# EAGLE board LED_base (EAGLE 9.6.2)
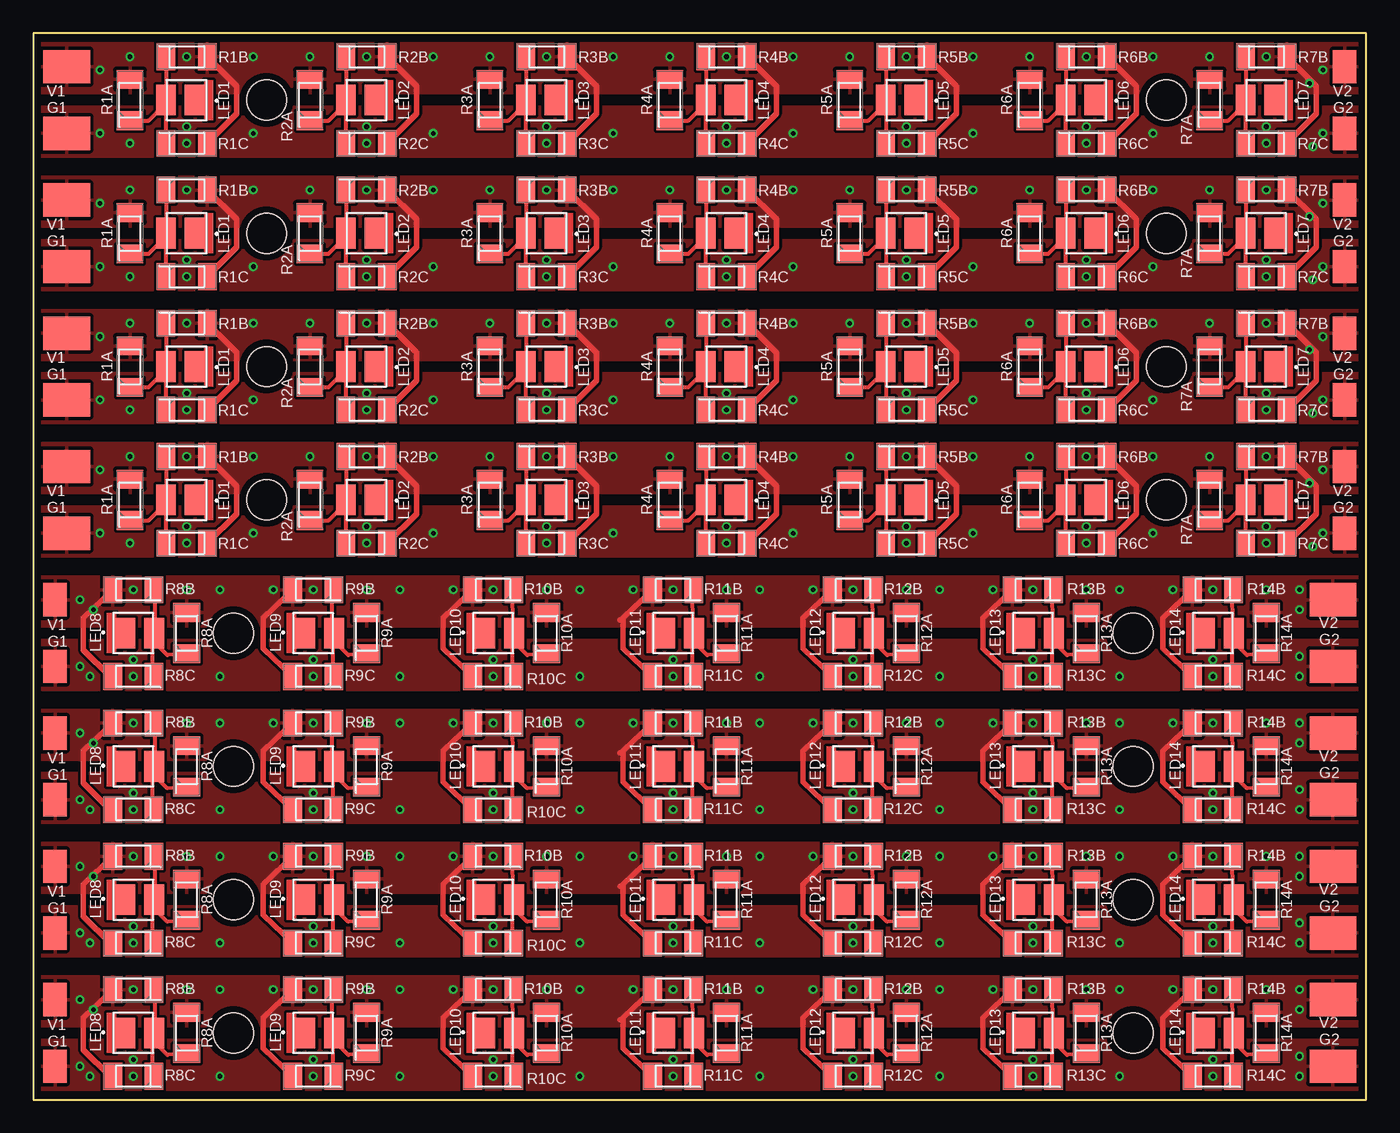
[diagram p0: board, top side]
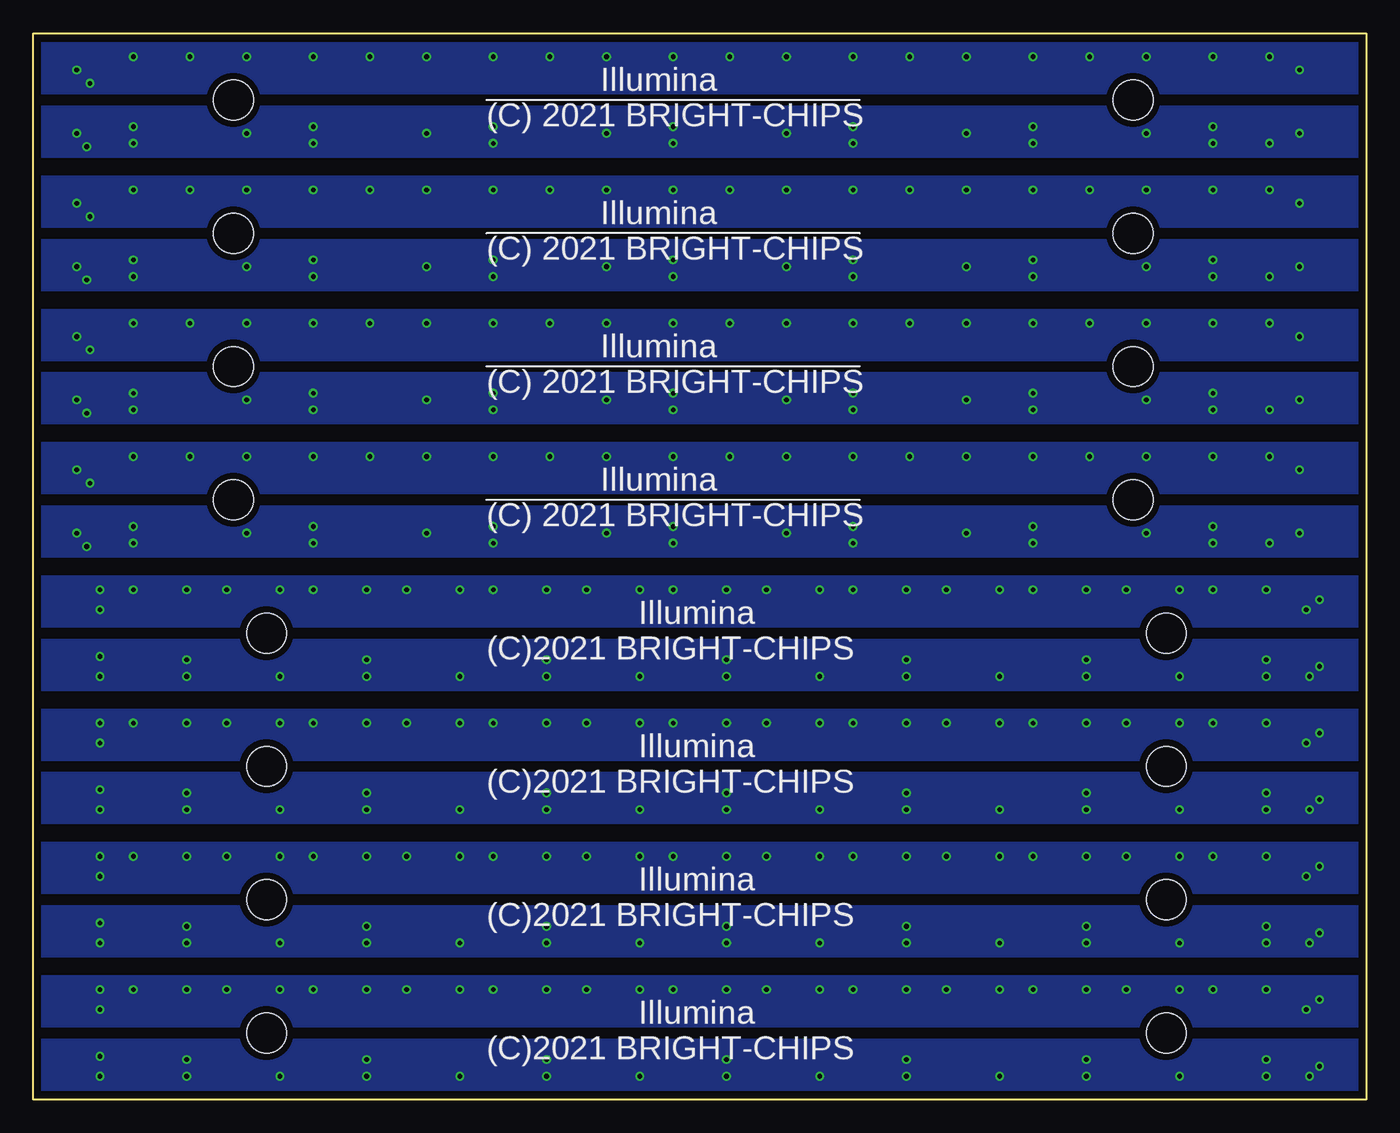
[diagram p1: board, bottom side, seen from below]

Size 100 x 80 mm. Coordinates in mm from the lower left corner, seen from the top.
Outline: 0,80 0,0 100,0 100,80 0,80
Copper layers (1*16): Top 0.035mm / dielectric 1.6mm / Bottom 0.035mm
Design rules "Elecrow_2-layer_PCB_eagle_rule": minimum track width 6mil, minimum drill 12mil, track to track 6mil, track to pad 6mil, pad to pad 6mil, via to via 8mil, smd to smd 0mil, copper to edge 20mil, drill to drill 10mil, minimum pad ring 6mil, minimum via ring 6mil, stop-mask expansion 0mil, vias tented up to drill 100mil, thermal gap 10mil
Net classes: 0 default: width 0.203 mm, clearance 0.203 mm; 1 PWRGND: width 0.406 mm, clearance 0.203 mm to class 0, clearance 0.203 mm
Holes 3 mm at 15,5 82.5,5 15,15 82.5,15 15,25 82.5,25 15,35 82.5,35 17.5,45 85,45 17.5,55 85,55 17.5,65 85,65 17.5,75 85,75
tKeepout: 7 lines

## Footprints (pad centres in the part's own frame; a part is rotated, then mirrored left to right if it is on the bottom)
SMD1.75-2.5 = smd 1.75 x 2.5: 1 0.875,1.25
SMD3.5-2.5 = smd 3.5 x 2.5: 1 1.75,1.25
NF2W757DRTX = smd 1.53 x 2.3: 1 -0.635,0 | smd 1.48 x 2.3: 2 1.56,0
SODFL3516X70NX = smd 1.4 x 2: 1 -1.55,0; 2 1.55,0

## Placement (x,y rotation side)
G1  [SMD1.75-2.5]  0.75,1.25 0 top
G2  [SMD3.5-2.5]  95.75,1.25 0 top
G3  [SMD3.5-2.5]  95.75,11.25 0 top
G4  [SMD1.75-2.5]  0.75,11.25 0 top
G5  [SMD3.5-2.5]  95.75,21.25 0 top
G6  [SMD1.75-2.5]  0.75,21.25 0 top
G7  [SMD3.5-2.5]  95.75,31.25 0 top
G8  [SMD1.75-2.5]  0.75,31.25 0 top
G9  [SMD3.5-2.5]  0.75,41.25 0 top
G10  [SMD1.75-2.5]  99.25,43.75 180 top
G11  [SMD3.5-2.5]  0.75,51.25 0 top
G12  [SMD1.75-2.5]  99.25,53.75 180 top
G13  [SMD3.5-2.5]  0.75,61.25 0 top
G14  [SMD1.75-2.5]  99.25,63.75 180 top
G15  [SMD3.5-2.5]  0.75,71.25 0 top
G16  [SMD1.75-2.5]  99.25,73.75 180 top
LED1  NF2W757GT-F1-5080  [NF2W757DRTX]  34.5,15 0 top
LED2  NF2W757GT-F1-5080  [NF2W757DRTX]  48,15 0 top
LED3  NF2W757GT-F1-5080  [NF2W757DRTX]  61.5,15 0 top
LED4  NF2W757GT-F1-5080  [NF2W757DRTX]  75,15 0 top
LED5  NF2W757GT-F1-5080  [NF2W757DRTX]  88.5,15 0 top
LED6  NF2W757GT-F1-5080  [NF2W757DRTX]  7.5,15 0 top
LED7  NF2W757GT-F1-5080  [NF2W757DRTX]  21,15 0 top
LED8  NF2W757GT-F1-5080  [NF2W757DRTX]  7.5,5 0 top
LED9  NF2W757GT-F1-5080  [NF2W757DRTX]  21,5 0 top
LED10  NF2W757GT-F1-5080  [NF2W757DRTX]  34.5,5 0 top
LED11  NF2W757GT-F1-5080  [NF2W757DRTX]  48,5 0 top
LED12  NF2W757GT-F1-5080  [NF2W757DRTX]  61.5,5 0 top
LED13  NF2W757GT-F1-5080  [NF2W757DRTX]  75,5 0 top
LED14  NF2W757GT-F1-5080  [NF2W757DRTX]  88.5,5 0 top
LED15  NF2W757GT-F1-5080  [NF2W757DRTX]  34.5,25 0 top
LED16  NF2W757GT-F1-5080  [NF2W757DRTX]  48,25 0 top
LED17  NF2W757GT-F1-5080  [NF2W757DRTX]  61.5,25 0 top
LED18  NF2W757GT-F1-5080  [NF2W757DRTX]  75,25 0 top
LED19  NF2W757GT-F1-5080  [NF2W757DRTX]  88.5,25 0 top
LED20  NF2W757GT-F1-5080  [NF2W757DRTX]  7.5,25 0 top
LED21  NF2W757GT-F1-5080  [NF2W757DRTX]  21,25 0 top
LED22  NF2W757GT-F1-5080  [NF2W757DRTX]  34.5,35 0 top
LED23  NF2W757GT-F1-5080  [NF2W757DRTX]  48,35 0 top
LED24  NF2W757GT-F1-5080  [NF2W757DRTX]  61.5,35 0 top
LED25  NF2W757GT-F1-5080  [NF2W757DRTX]  75,35 0 top
LED26  NF2W757GT-F1-5080  [NF2W757DRTX]  88.5,35 0 top
LED27  NF2W757GT-F1-5080  [NF2W757DRTX]  7.5,35 0 top
LED28  NF2W757GT-F1-5080  [NF2W757DRTX]  21,35 0 top
LED29  NF2W757GT-F1-5080  [NF2W757DRTX]  11.5,45 180 top
LED30  NF2W757GT-F1-5080  [NF2W757DRTX]  25,45 180 top
LED31  NF2W757GT-F1-5080  [NF2W757DRTX]  38.5,45 180 top
LED32  NF2W757GT-F1-5080  [NF2W757DRTX]  52,45 180 top
LED33  NF2W757GT-F1-5080  [NF2W757DRTX]  65.5,45 180 top
LED34  NF2W757GT-F1-5080  [NF2W757DRTX]  79,45 180 top
LED35  NF2W757GT-F1-5080  [NF2W757DRTX]  92.5,45 180 top
LED36  NF2W757GT-F1-5080  [NF2W757DRTX]  11.5,55 180 top
LED37  NF2W757GT-F1-5080  [NF2W757DRTX]  25,55 180 top
LED38  NF2W757GT-F1-5080  [NF2W757DRTX]  38.5,55 180 top
LED39  NF2W757GT-F1-5080  [NF2W757DRTX]  52,55 180 top
LED40  NF2W757GT-F1-5080  [NF2W757DRTX]  65.5,55 180 top
LED41  NF2W757GT-F1-5080  [NF2W757DRTX]  79,55 180 top
LED42  NF2W757GT-F1-5080  [NF2W757DRTX]  92.5,55 180 top
LED43  NF2W757GT-F1-5080  [NF2W757DRTX]  11.5,65 180 top
LED44  NF2W757GT-F1-5080  [NF2W757DRTX]  25,65 180 top
LED45  NF2W757GT-F1-5080  [NF2W757DRTX]  38.5,65 180 top
LED46  NF2W757GT-F1-5080  [NF2W757DRTX]  52,65 180 top
LED47  NF2W757GT-F1-5080  [NF2W757DRTX]  65.5,65 180 top
LED48  NF2W757GT-F1-5080  [NF2W757DRTX]  79,65 180 top
LED49  NF2W757GT-F1-5080  [NF2W757DRTX]  92.5,65 180 top
LED50  NF2W757GT-F1-5080  [NF2W757DRTX]  11.5,75 180 top
LED51  NF2W757GT-F1-5080  [NF2W757DRTX]  25,75 180 top
LED52  NF2W757GT-F1-5080  [NF2W757DRTX]  38.5,75 180 top
LED53  NF2W757GT-F1-5080  [NF2W757DRTX]  52,75 180 top
LED54  NF2W757GT-F1-5080  [NF2W757DRTX]  65.5,75 180 top
LED55  NF2W757GT-F1-5080  [NF2W757DRTX]  79,75 180 top
LED56  NF2W757GT-F1-5080  [NF2W757DRTX]  92.5,75 180 top
R1A  S-183T  [SODFL3516X70NX]  7.25,45 90 top
R1A1  S-183T  [SODFL3516X70NX]  7.25,55 90 top
R1A2  S-183T  [SODFL3516X70NX]  7.25,65 90 top
R1A3  S-183T  [SODFL3516X70NX]  7.25,75 90 top
R1B  S-183T  [SODFL3516X70NX]  11.5,48.25 0 top
R1B1  S-183T  [SODFL3516X70NX]  11.5,58.25 0 top
R1B2  S-183T  [SODFL3516X70NX]  11.5,68.25 0 top
R1B3  S-183T  [SODFL3516X70NX]  11.5,78.25 0 top
R1C  S-183T  [SODFL3516X70NX]  11.5,41.75 0 top
R1C1  S-183T  [SODFL3516X70NX]  11.5,51.75 0 top
R1C2  S-183T  [SODFL3516X70NX]  11.5,61.75 0 top
R1C3  S-183T  [SODFL3516X70NX]  11.5,71.75 0 top
R2A  S-183T  [SODFL3516X70NX]  20.75,45 90 top
R2A1  S-183T  [SODFL3516X70NX]  20.75,55 90 top
R2A2  S-183T  [SODFL3516X70NX]  20.75,65 90 top
R2A3  S-183T  [SODFL3516X70NX]  20.75,75 90 top
R2B  S-183T  [SODFL3516X70NX]  25,48.25 0 top
R2B1  S-183T  [SODFL3516X70NX]  25,58.25 0 top
R2B2  S-183T  [SODFL3516X70NX]  25,68.25 0 top
R2B3  S-183T  [SODFL3516X70NX]  25,78.25 0 top
R2C  S-183T  [SODFL3516X70NX]  25,41.75 0 top
R2C1  S-183T  [SODFL3516X70NX]  25,51.75 0 top
R2C2  S-183T  [SODFL3516X70NX]  25,61.75 0 top
R2C3  S-183T  [SODFL3516X70NX]  25,71.75 0 top
R3A  S-183T  [SODFL3516X70NX]  34.25,45 90 top
R3A1  S-183T  [SODFL3516X70NX]  34.25,55 90 top
R3A2  S-183T  [SODFL3516X70NX]  34.25,65 90 top
R3A3  S-183T  [SODFL3516X70NX]  34.25,75 90 top
R3B  S-183T  [SODFL3516X70NX]  38.5,48.25 0 top
R3B1  S-183T  [SODFL3516X70NX]  38.5,58.25 0 top
R3B2  S-183T  [SODFL3516X70NX]  38.5,68.25 0 top
R3B3  S-183T  [SODFL3516X70NX]  38.5,78.25 0 top
R3C  S-183T  [SODFL3516X70NX]  38.5,41.75 0 top
R3C1  S-183T  [SODFL3516X70NX]  38.5,51.75 0 top
R3C2  S-183T  [SODFL3516X70NX]  38.5,61.75 0 top
R3C3  S-183T  [SODFL3516X70NX]  38.5,71.75 0 top
R4A  S-183T  [SODFL3516X70NX]  47.75,45 90 top
R4A1  S-183T  [SODFL3516X70NX]  47.75,55 90 top
R4A2  S-183T  [SODFL3516X70NX]  47.75,65 90 top
R4A3  S-183T  [SODFL3516X70NX]  47.75,75 90 top
R4B  S-183T  [SODFL3516X70NX]  52,48.25 0 top
R4B1  S-183T  [SODFL3516X70NX]  52,58.25 0 top
R4B2  S-183T  [SODFL3516X70NX]  52,68.25 0 top
R4B3  S-183T  [SODFL3516X70NX]  52,78.25 0 top
R4C  S-183T  [SODFL3516X70NX]  52,41.75 0 top
R4C1  S-183T  [SODFL3516X70NX]  52,51.75 0 top
R4C2  S-183T  [SODFL3516X70NX]  52,61.75 0 top
R4C3  S-183T  [SODFL3516X70NX]  52,71.75 0 top
R5A  S-183T  [SODFL3516X70NX]  61.25,45 90 top
R5A1  S-183T  [SODFL3516X70NX]  61.25,55 90 top
R5A2  S-183T  [SODFL3516X70NX]  61.25,65 90 top
R5A3  S-183T  [SODFL3516X70NX]  61.25,75 90 top
R5B  S-183T  [SODFL3516X70NX]  65.5,48.25 0 top
R5B1  S-183T  [SODFL3516X70NX]  65.5,58.25 0 top
R5B2  S-183T  [SODFL3516X70NX]  65.5,68.25 0 top
R5B3  S-183T  [SODFL3516X70NX]  65.5,78.25 0 top
R5C  S-183T  [SODFL3516X70NX]  65.5,41.75 0 top
R5C1  S-183T  [SODFL3516X70NX]  65.5,51.75 0 top
R5C2  S-183T  [SODFL3516X70NX]  65.5,61.75 0 top
R5C3  S-183T  [SODFL3516X70NX]  65.5,71.75 0 top
R6A  S-183T  [SODFL3516X70NX]  74.75,45 90 top
R6A1  S-183T  [SODFL3516X70NX]  74.75,55 90 top
R6A2  S-183T  [SODFL3516X70NX]  74.75,65 90 top
R6A3  S-183T  [SODFL3516X70NX]  74.75,75 90 top
R6B  S-183T  [SODFL3516X70NX]  79,48.25 0 top
R6B1  S-183T  [SODFL3516X70NX]  79,58.25 0 top
R6B2  S-183T  [SODFL3516X70NX]  79,68.25 0 top
R6B3  S-183T  [SODFL3516X70NX]  79,78.25 0 top
R6C  S-183T  [SODFL3516X70NX]  79,41.75 0 top
R6C1  S-183T  [SODFL3516X70NX]  79,51.75 0 top
R6C2  S-183T  [SODFL3516X70NX]  79,61.75 0 top
R6C3  S-183T  [SODFL3516X70NX]  79,71.75 0 top
R7A  S-183T  [SODFL3516X70NX]  88.25,45 90 top
R7A1  S-183T  [SODFL3516X70NX]  88.25,55 90 top
R7A2  S-183T  [SODFL3516X70NX]  88.25,65 90 top
R7A3  S-183T  [SODFL3516X70NX]  88.25,75 90 top
R7B  S-183T  [SODFL3516X70NX]  92.5,48.25 0 top
R7B1  S-183T  [SODFL3516X70NX]  92.5,58.25 0 top
R7B2  S-183T  [SODFL3516X70NX]  92.5,68.25 0 top
R7B3  S-183T  [SODFL3516X70NX]  92.5,78.25 0 top
R7C  S-183T  [SODFL3516X70NX]  92.5,41.75 0 top
R7C1  S-183T  [SODFL3516X70NX]  92.5,51.75 0 top
R7C2  S-183T  [SODFL3516X70NX]  92.5,61.75 0 top
R7C3  S-183T  [SODFL3516X70NX]  92.5,71.75 0 top
R8A  S-183T  [SODFL3516X70NX]  11.5,5 90 top
R8A1  S-183T  [SODFL3516X70NX]  11.5,15 90 top
R8A2  S-183T  [SODFL3516X70NX]  11.5,25 90 top
R8A3  S-183T  [SODFL3516X70NX]  11.5,35 90 top
R8B  S-183T  [SODFL3516X70NX]  7.5,8.25 180 top
R8B1  S-183T  [SODFL3516X70NX]  7.5,18.25 180 top
R8B2  S-183T  [SODFL3516X70NX]  7.5,28.25 180 top
R8B3  S-183T  [SODFL3516X70NX]  7.5,38.25 180 top
R8C  S-183T  [SODFL3516X70NX]  7.5,1.75 180 top
R8C1  S-183T  [SODFL3516X70NX]  7.5,11.75 180 top
R8C2  S-183T  [SODFL3516X70NX]  7.5,21.75 180 top
R8C3  S-183T  [SODFL3516X70NX]  7.5,31.75 180 top
R9A  S-183T  [SODFL3516X70NX]  25,5 90 top
R9A1  S-183T  [SODFL3516X70NX]  25,15 90 top
R9A2  S-183T  [SODFL3516X70NX]  25,25 90 top
R9A3  S-183T  [SODFL3516X70NX]  25,35 90 top
R9B  S-183T  [SODFL3516X70NX]  21,8.25 180 top
R9B1  S-183T  [SODFL3516X70NX]  21,18.25 180 top
R9B2  S-183T  [SODFL3516X70NX]  21,28.25 180 top
R9B3  S-183T  [SODFL3516X70NX]  21,38.25 180 top
R9C  S-183T  [SODFL3516X70NX]  21,1.75 180 top
R9C1  S-183T  [SODFL3516X70NX]  21,11.75 180 top
R9C2  S-183T  [SODFL3516X70NX]  21,21.75 180 top
R9C3  S-183T  [SODFL3516X70NX]  21,31.75 180 top
R10A  S-183T  [SODFL3516X70NX]  38.5,5 90 top
R10A1  S-183T  [SODFL3516X70NX]  38.5,15 90 top
R10A2  S-183T  [SODFL3516X70NX]  38.5,25 90 top
R10A3  S-183T  [SODFL3516X70NX]  38.5,35 90 top
R10B  S-183T  [SODFL3516X70NX]  34.5,8.25 180 top
R10B1  S-183T  [SODFL3516X70NX]  34.5,18.25 180 top
R10B2  S-183T  [SODFL3516X70NX]  34.5,28.25 180 top
R10B3  S-183T  [SODFL3516X70NX]  34.5,38.25 180 top
R10C  S-183T  [SODFL3516X70NX]  34.5,1.75 180 top
R10C1  S-183T  [SODFL3516X70NX]  34.5,11.75 180 top
R10C2  S-183T  [SODFL3516X70NX]  34.5,21.75 180 top
R10C3  S-183T  [SODFL3516X70NX]  34.5,31.75 180 top
R11A  S-183T  [SODFL3516X70NX]  52,5 90 top
R11A1  S-183T  [SODFL3516X70NX]  52,15 90 top
R11A2  S-183T  [SODFL3516X70NX]  52,25 90 top
R11A3  S-183T  [SODFL3516X70NX]  52,35 90 top
R11B  S-183T  [SODFL3516X70NX]  48,8.25 180 top
R11B1  S-183T  [SODFL3516X70NX]  48,18.25 180 top
R11B2  S-183T  [SODFL3516X70NX]  48,28.25 180 top
R11B3  S-183T  [SODFL3516X70NX]  48,38.25 180 top
R11C  S-183T  [SODFL3516X70NX]  48,1.75 180 top
R11C1  S-183T  [SODFL3516X70NX]  48,11.75 180 top
R11C2  S-183T  [SODFL3516X70NX]  48,21.75 180 top
R11C3  S-183T  [SODFL3516X70NX]  48,31.75 180 top
R12A  S-183T  [SODFL3516X70NX]  65.5,5 90 top
R12A1  S-183T  [SODFL3516X70NX]  65.5,15 90 top
R12A2  S-183T  [SODFL3516X70NX]  65.5,25 90 top
R12A3  S-183T  [SODFL3516X70NX]  65.5,35 90 top
R12B  S-183T  [SODFL3516X70NX]  61.5,8.25 180 top
R12B1  S-183T  [SODFL3516X70NX]  61.5,18.25 180 top
R12B2  S-183T  [SODFL3516X70NX]  61.5,28.25 180 top
R12B3  S-183T  [SODFL3516X70NX]  61.5,38.25 180 top
R12C  S-183T  [SODFL3516X70NX]  61.5,1.75 180 top
R12C1  S-183T  [SODFL3516X70NX]  61.5,11.75 180 top
R12C2  S-183T  [SODFL3516X70NX]  61.5,21.75 180 top
R12C3  S-183T  [SODFL3516X70NX]  61.5,31.75 180 top
R13A  S-183T  [SODFL3516X70NX]  79,5 90 top
R13A1  S-183T  [SODFL3516X70NX]  79,15 90 top
R13A2  S-183T  [SODFL3516X70NX]  79,25 90 top
R13A3  S-183T  [SODFL3516X70NX]  79,35 90 top
R13B  S-183T  [SODFL3516X70NX]  75,8.25 180 top
R13B1  S-183T  [SODFL3516X70NX]  75,18.25 180 top
R13B2  S-183T  [SODFL3516X70NX]  75,28.25 180 top
R13B3  S-183T  [SODFL3516X70NX]  75,38.25 180 top
R13C  S-183T  [SODFL3516X70NX]  75,1.75 180 top
R13C1  S-183T  [SODFL3516X70NX]  75,11.75 180 top
R13C2  S-183T  [SODFL3516X70NX]  75,21.75 180 top
R13C3  S-183T  [SODFL3516X70NX]  75,31.75 180 top
R14A  S-183T  [SODFL3516X70NX]  92.5,5 90 top
R14A1  S-183T  [SODFL3516X70NX]  92.5,15 90 top
R14A2  S-183T  [SODFL3516X70NX]  92.5,25 90 top
R14A3  S-183T  [SODFL3516X70NX]  92.5,35 90 top
R14B  S-183T  [SODFL3516X70NX]  88.5,8.25 180 top
R14B1  S-183T  [SODFL3516X70NX]  88.5,18.25 180 top
R14B2  S-183T  [SODFL3516X70NX]  88.5,28.25 180 top
R14B3  S-183T  [SODFL3516X70NX]  88.5,38.25 180 top
R14C  S-183T  [SODFL3516X70NX]  88.5,1.75 180 top
R14C1  S-183T  [SODFL3516X70NX]  88.5,11.75 180 top
R14C2  S-183T  [SODFL3516X70NX]  88.5,21.75 180 top
R14C3  S-183T  [SODFL3516X70NX]  88.5,31.75 180 top
V1  [SMD1.75-2.5]  0.75,6.25 0 top
V2  [SMD3.5-2.5]  95.75,6.25 0 top
V3  [SMD1.75-2.5]  0.75,16.25 0 top
V4  [SMD3.5-2.5]  95.75,16.25 0 top
V5  [SMD1.75-2.5]  0.75,26.25 0 top
V6  [SMD3.5-2.5]  95.75,26.25 0 top
V7  [SMD1.75-2.5]  0.75,36.25 0 top
V8  [SMD3.5-2.5]  95.75,36.25 0 top
V9  [SMD3.5-2.5]  0.75,46.25 0 top
V10  [SMD1.75-2.5]  99.25,48.75 180 top
V11  [SMD3.5-2.5]  0.75,56.25 0 top
V12  [SMD1.75-2.5]  99.25,58.75 180 top
V13  [SMD3.5-2.5]  0.75,66.25 0 top
V14  [SMD1.75-2.5]  99.25,68.75 180 top
V15  [SMD3.5-2.5]  0.75,76.25 0 top
V16  [SMD1.75-2.5]  99.25,78.75 180 top

## Library data of the parts
G1-G16 V1-V16 = LED_base
LED1-LED56 = LED_base; DESCRIPTION: Nichia NF2W757GT-F1-5080, 5000K Bi-colour White LED, 5080 Diffused SMD package; HEIGHT: mm; MANUFACTURER_NAME: NICHIA; MANUFACTURER_PART_NUMBER: NF2W757GT-F1-5080; RS_PART_NUMBER: 1372170; RS_PRICE-STOCK: http://uk.rs-online.com/web/p/products/1372170
R1A R1A1-R1A3 R1B R1B1-R1B3 R1C R1C1-R1C3 R2A R2A1-R2A3 R2B R2B1-R2B3 R2C R2C1-R2C3 R3A R3A1-R3A3 R3B R3B1-R3B3 R3C R3C1-R3C3 R4A R4A1-R4A3 R4B R4B1-R4B3 R4C R4C1-R4C3 R5A R5A1-R5A3 R5B R5B1-R5B3 R5C R5C1-R5C3 R6A R6A1-R6A3 R6B R6B1-R6B3 R6C R6C1-R6C3 R7A R7A1-R7A3 R7B R7B1-R7B3 R7C R7C1-R7C3 R8A R8A1-R8A3 R8B R8B1-R8B3 R8C R8C1-R8C3 R9A R9A1-R9A3 R9B R9B1-R9B3 R9C R9C1-R9C3 R10A R10A1-R10A3 R10B R10B1-R10B3 R10C R10C1-R10C3 R11A R11A1-R11A3 R11B R11B1-R11B3 R11C R11C1-R11C3 R12A R12A1-R12A3 R12B R12B1-R12B3 R12C R12C1-R12C3 R13A R13A1-R13A3 R13B R13B1-R13B3 R13C R13C1-R13C3 R14A R14A1-R14A3 R14B R14B1-R14B3 R14C R14C1-R14C3 = LED_base; DESCRIPTION: SEMITEC S-183T Constant Current Diode, 20mA, 4.6V max, 2-Pin SMD; HEIGHT: 0.7mm; MANUFACTURER_NAME: Semitec; MANUFACTURER_PART_NUMBER: S-183T; MOUSER_PART_NUMBER: 954-S-183T; MOUSER_PRICE-STOCK: https://www.mouser.com/Search/Refine.aspx?Keyword=954-S-183T

## Nets
GND [PWRGND]: G1.1 G2.1 LED8.1 LED9.1 LED10.1 LED11.1 LED12.1 LED13.1 LED14.1
GND1 [PWRGND]: G3.1 G4.1 LED1.1 LED2.1 LED3.1 LED4.1 LED5.1 LED6.1 LED7.1
GND2 [PWRGND]: G5.1 G6.1 LED15.1 LED16.1 LED17.1 LED18.1 LED19.1 LED20.1 LED21.1
GND3 [PWRGND]: G7.1 G8.1 LED22.1 LED23.1 LED24.1 LED25.1 LED26.1 LED27.1 LED28.1
GND4 [PWRGND]: G9.1 G10.1 LED29.1 LED30.1 LED31.1 LED32.1 LED33.1 LED34.1 LED35.1
GND5 [PWRGND]: G11.1 G12.1 LED36.1 LED37.1 LED38.1 LED39.1 LED40.1 LED41.1 LED42.1
GND6 [PWRGND]: G13.1 G14.1 LED43.1 LED44.1 LED45.1 LED46.1 LED47.1 LED48.1 LED49.1
GND7 [PWRGND]: G15.1 G16.1 LED50.1 LED51.1 LED52.1 LED53.1 LED54.1 LED55.1 LED56.1
N$1: LED8.2 R8A.1 R8B.1 R8C.1
N$2: LED9.2 R9A.1 R9B.1 R9C.1
N$3: LED10.2 R10A.1 R10B.1 R10C.1
N$4: LED11.2 R11A.1 R11B.1 R11C.1
N$5: LED12.2 R12A.1 R12B.1 R12C.1
N$6: LED13.2 R13A.1 R13B.1 R13C.1
N$7: LED14.2 R14A.1 R14B.1 R14C.1
N$8: LED6.2 R8A1.1 R8B1.1 R8C1.1
N$9: LED7.2 R9A1.1 R9B1.1 R9C1.1
N$10: LED1.2 R10A1.1 R10B1.1 R10C1.1
N$11: LED2.2 R11A1.1 R11B1.1 R11C1.1
N$12: LED3.2 R12A1.1 R12B1.1 R12C1.1
N$13: LED4.2 R13A1.1 R13B1.1 R13C1.1
N$14: LED5.2 R14A1.1 R14B1.1 R14C1.1
N$15: LED20.2 R8A2.1 R8B2.1 R8C2.1
N$16: LED21.2 R9A2.1 R9B2.1 R9C2.1
N$17: LED15.2 R10A2.1 R10B2.1 R10C2.1
N$18: LED16.2 R11A2.1 R11B2.1 R11C2.1
N$19: LED17.2 R12A2.1 R12B2.1 R12C2.1
N$20: LED18.2 R13A2.1 R13B2.1 R13C2.1
N$21: LED19.2 R14A2.1 R14B2.1 R14C2.1
N$22: LED27.2 R8A3.1 R8B3.1 R8C3.1
N$23: LED28.2 R9A3.1 R9B3.1 R9C3.1
N$24: LED22.2 R10A3.1 R10B3.1 R10C3.1
N$25: LED23.2 R11A3.1 R11B3.1 R11C3.1
N$26: LED24.2 R12A3.1 R12B3.1 R12C3.1
N$27: LED25.2 R13A3.1 R13B3.1 R13C3.1
N$28: LED26.2 R14A3.1 R14B3.1 R14C3.1
N$29: LED29.2 R1A.1 R1B.1 R1C.1
N$30: LED30.2 R2A.1 R2B.1 R2C.1
N$31: LED31.2 R3A.1 R3B.1 R3C.1
N$32: LED32.2 R4A.1 R4B.1 R4C.1
N$33: LED33.2 R5A.1 R5B.1 R5C.1
N$34: LED34.2 R6A.1 R6B.1 R6C.1
N$35: LED35.2 R7A.1 R7B.1 R7C.1
N$36: LED36.2 R1A1.1 R1B1.1 R1C1.1
N$37: LED37.2 R2A1.1 R2B1.1 R2C1.1
N$38: LED38.2 R3A1.1 R3B1.1 R3C1.1
N$39: LED39.2 R4A1.1 R4B1.1 R4C1.1
N$40: LED40.2 R5A1.1 R5B1.1 R5C1.1
N$41: LED41.2 R6A1.1 R6B1.1 R6C1.1
N$42: LED42.2 R7A1.1 R7B1.1 R7C1.1
N$43: LED43.2 R1A2.1 R1B2.1 R1C2.1
N$44: LED44.2 R2A2.1 R2B2.1 R2C2.1
N$45: LED45.2 R3A2.1 R3B2.1 R3C2.1
N$46: LED46.2 R4A2.1 R4B2.1 R4C2.1
N$47: LED47.2 R5A2.1 R5B2.1 R5C2.1
N$48: LED48.2 R6A2.1 R6B2.1 R6C2.1
N$49: LED49.2 R7A2.1 R7B2.1 R7C2.1
N$50: LED50.2 R1A3.1 R1B3.1 R1C3.1
N$51: LED51.2 R2A3.1 R2B3.1 R2C3.1
N$52: LED52.2 R3A3.1 R3B3.1 R3C3.1
N$53: LED53.2 R4A3.1 R4B3.1 R4C3.1
N$54: LED54.2 R5A3.1 R5B3.1 R5C3.1
N$55: LED55.2 R6A3.1 R6B3.1 R6C3.1
N$56: LED56.2 R7A3.1 R7B3.1 R7C3.1
POWER [PWRGND]: R8A.2 R8B.2 R8C.2 R9A.2 R9B.2 R9C.2 R10A.2 R10B.2 R10C.2 R11A.2 R11B.2 R11C.2 R12A.2 R12B.2 R12C.2 R13A.2 R13B.2 R13C.2 R14A.2 R14B.2 R14C.2 V1.1 V2.1
POWER1 [PWRGND]: R8A1.2 R8B1.2 R8C1.2 R9A1.2 R9B1.2 R9C1.2 R10A1.2 R10B1.2 R10C1.2 R11A1.2 R11B1.2 R11C1.2 R12A1.2 R12B1.2 R12C1.2 R13A1.2 R13B1.2 R13C1.2 R14A1.2 R14B1.2 R14C1.2 V3.1 V4.1
POWER2 [PWRGND]: R8A2.2 R8B2.2 R8C2.2 R9A2.2 R9B2.2 R9C2.2 R10A2.2 R10B2.2 R10C2.2 R11A2.2 R11B2.2 R11C2.2 R12A2.2 R12B2.2 R12C2.2 R13A2.2 R13B2.2 R13C2.2 R14A2.2 R14B2.2 R14C2.2 V5.1 V6.1
POWER3 [PWRGND]: R8A3.2 R8B3.2 R8C3.2 R9A3.2 R9B3.2 R9C3.2 R10A3.2 R10B3.2 R10C3.2 R11A3.2 R11B3.2 R11C3.2 R12A3.2 R12B3.2 R12C3.2 R13A3.2 R13B3.2 R13C3.2 R14A3.2 R14B3.2 R14C3.2 V7.1 V8.1
POWER4 [PWRGND]: R1A.2 R1B.2 R1C.2 R2A.2 R2B.2 R2C.2 R3A.2 R3B.2 R3C.2 R4A.2 R4B.2 R4C.2 R5A.2 R5B.2 R5C.2 R6A.2 R6B.2 R6C.2 R7A.2 R7B.2 R7C.2 V9.1 V10.1
POWER5 [PWRGND]: R1A1.2 R1B1.2 R1C1.2 R2A1.2 R2B1.2 R2C1.2 R3A1.2 R3B1.2 R3C1.2 R4A1.2 R4B1.2 R4C1.2 R5A1.2 R5B1.2 R5C1.2 R6A1.2 R6B1.2 R6C1.2 R7A1.2 R7B1.2 R7C1.2 V11.1 V12.1
POWER6 [PWRGND]: R1A2.2 R1B2.2 R1C2.2 R2A2.2 R2B2.2 R2C2.2 R3A2.2 R3B2.2 R3C2.2 R4A2.2 R4B2.2 R4C2.2 R5A2.2 R5B2.2 R5C2.2 R6A2.2 R6B2.2 R6C2.2 R7A2.2 R7B2.2 R7C2.2 V13.1 V14.1
POWER7 [PWRGND]: R1A3.2 R1B3.2 R1C3.2 R2A3.2 R2B3.2 R2C3.2 R3A3.2 R3B3.2 R3C3.2 R4A3.2 R4B3.2 R4C3.2 R5A3.2 R5B3.2 R5C3.2 R6A3.2 R6B3.2 R6C3.2 R7A3.2 R7B3.2 R7C3.2 V15.1 V16.1

## Tracks (layer width: path | path; a pad name or v marks a point on that pad's centre or on a via)
GND  (via drill 0.35)
  other vias: 95,3.25 95,1.75 88.5,1.75 75,1.75 61.5,1.75 48,1.75 34.5,1.75 21,1.75 7.5,1.75 4.25,1.75 14,1.75 27.5,1.75 41,1.75 54.5,1.75 68,1.75 81.5,1.75 88.5,3 75,3 61.5,3 48,3 34.5,3 21,3 7.5,3 3.5,2.5
  pour Bottom: 0.5,4.5 0.5,0.75 99.5,0.75 99.5,4.5
  pour Top: 0.5,4.5 0.5,0.75 99.5,0.75 99.5,4.5
GND1  (via drill 0.35)
  other vias: 95,13.25 95,11.75 88.5,11.75 75,11.75 61.5,11.75 48,11.75 34.5,11.75 21,11.75 7.5,11.75 4.25,11.75 14,11.75 27.5,11.75 41,11.75 54.5,11.75 68,11.75 81.5,11.75 88.5,13 75,13 61.5,13 48,13 34.5,13 21,13 7.5,13 3.5,12.5
  pour Bottom: 0.5,14.5 0.5,10.75 99.5,10.75 99.5,14.5
  pour Top: 0.5,14.5 0.5,10.75 99.5,10.75 99.5,14.5
GND2  (via drill 0.35)
  other vias: 95,23.25 95,21.75 88.5,21.75 75,21.75 61.5,21.75 48,21.75 34.5,21.75 21,21.75 7.5,21.75 4.25,21.75 14,21.75 27.5,21.75 41,21.75 54.5,21.75 68,21.75 81.5,21.75 88.5,23 75,23 61.5,23 48,23 34.5,23 21,23 7.5,23 3.5,22.5
  pour Bottom: 0.5,24.5 0.5,20.75 99.5,20.75 99.5,24.5
  pour Top: 0.5,24.5 0.5,20.75 99.5,20.75 99.5,24.5
GND3  (via drill 0.35)
  other vias: 95,33.25 95,31.75 88.5,31.75 75,31.75 61.5,31.75 48,31.75 34.5,31.75 21,31.75 7.5,31.75 4.25,31.75 14,31.75 27.5,31.75 41,31.75 54.5,31.75 68,31.75 81.5,31.75 88.5,33 75,33 61.5,33 48,33 34.5,33 21,33 7.5,33 3.5,32.5
  pour Bottom: 0.5,34.5 0.5,30.75 99.5,30.75 99.5,34.5
  pour Top: 0.5,34.5 0.5,30.75 99.5,30.75 99.5,34.5
GND4  (via drill 0.35)
  other vias: 5,42.5 16.5,42.5 30,42.5 43.5,42.5 57,42.5 70.5,42.5 84,42.5 96.75,42.5 92.5,41.75 79,41.75 65.5,41.75 52,41.75 38.5,41.75 25,41.75 11.5,41.75 7.25,41.75 11.5,43 25,43 38.5,43 52,43 65.5,43 79,43 92.5,43 96,41.5
  pour Bottom: 0.5,40.75 99.5,40.75 99.5,44.5 0.5,44.5
  pour Top: 0.5,44.5 0.5,40.75 99.5,40.75 99.5,44.5
GND5  (via drill 0.35)
  other vias: 5,52.5 16.5,52.5 30,52.5 43.5,52.5 57,52.5 70.5,52.5 84,52.5 96.75,52.5 92.5,51.75 79,51.75 65.5,51.75 52,51.75 38.5,51.75 25,51.75 11.5,51.75 7.25,51.75 11.5,53 25,53 38.5,53 52,53 65.5,53 79,53 92.5,53 96,51.5
  pour Bottom: 0.5,50.75 99.5,50.75 99.5,54.5 0.5,54.5
  pour Top: 0.5,54.5 0.5,50.75 99.5,50.75 99.5,54.5
GND6  (via drill 0.35)
  other vias: 5,62.5 16.5,62.5 30,62.5 43.5,62.5 57,62.5 70.5,62.5 84,62.5 96.75,62.5 92.5,61.75 79,61.75 65.5,61.75 52,61.75 38.5,61.75 25,61.75 11.5,61.75 7.25,61.75 11.5,63 25,63 38.5,63 52,63 65.5,63 79,63 92.5,63 96,61.5
  pour Bottom: 0.5,60.75 99.5,60.75 99.5,64.5 0.5,64.5
  pour Top: 0.5,64.5 0.5,60.75 99.5,60.75 99.5,64.5
GND7  (via drill 0.35)
  other vias: 5,72.5 16.5,72.5 30,72.5 43.5,72.5 57,72.5 70.5,72.5 84,72.5 96.75,72.5 92.5,71.75 79,71.75 65.5,71.75 52,71.75 38.5,71.75 25,71.75 11.5,71.75 7.25,71.75 11.5,73 25,73 38.5,73 52,73 65.5,73 79,73 92.5,73 96,71.5
  pour Bottom: 0.5,70.75 99.5,70.75 99.5,74.5 0.5,74.5
  pour Top: 0.5,74.5 0.5,70.75 99.5,70.75 99.5,74.5
N$1
  Top 0.305: R8B.1 9.15,5.24 LED8.2 8.91,4.5 | 8.91,4.5 8.91,1.99 R8C.1 | R8A.1 10.06,3.35 8.91,4.5
N$2
  Top 0.305: R9B.1 22.39,7.99 22.39,5.02 LED9.2 22.72,4.69 22.72,4.25 | R9C.1 22.47,1.93 22.47,4.5 22.72,4.25 | R9A.1 23.62,3.35 22.72,4.25
N$3
  Top 0.305: R10B.1 35.91,8.01 LED10.2 35.91,4.5 | 35.91,4.5 35.91,1.99 R10C.1 | R10A.1 37.06,3.35 35.91,4.5
N$4
  Top 0.305: R11B.1 49.41,8.01 LED11.2 49.41,4.5 | 49.41,4.5 49.41,1.99 R11C.1 | R11A.1 50.56,3.35 49.41,4.5
N$5
  Top 0.305: R12B.1 62.91,8.01 LED12.2 62.91,4.5 | 62.91,4.5 62.91,1.99 R12C.1 | R12A.1 64.06,3.35 62.91,4.5
N$6
  Top 0.305: R13B.1 76.41,8.01 LED13.2 76.41,4.5 | 76.41,4.5 76.41,1.99 R13C.1 | R13A.1 77.56,3.35 76.41,4.5
N$7
  Top 0.305: R14B.1 89.91,8.01 LED14.2 89.91,4.5 | 89.91,4.5 89.91,1.99 R14C.1 | R14A.1 91.06,3.35 89.91,4.5
N$8
  Top 0.305: R8B1.1 9.15,15.24 LED6.2 8.91,14.5 | 8.91,14.5 8.91,11.99 R8C1.1 | R8A1.1 10.06,13.35 8.91,14.5
N$9
  Top 0.305: R9B1.1 22.39,17.99 22.39,15.02 LED7.2 22.72,14.69 22.72,14.25 | R9C1.1 22.47,11.93 22.47,14.5 22.72,14.25 | R9A1.1 23.62,13.35 22.72,14.25
N$10
  Top 0.305: R10B1.1 35.91,18.01 LED1.2 35.91,14.5 | 35.91,14.5 35.91,11.99 R10C1.1 | R10A1.1 37.06,13.35 35.91,14.5
N$11
  Top 0.305: R11B1.1 49.41,18.01 LED2.2 49.41,14.5 | 49.41,14.5 49.41,11.99 R11C1.1 | R11A1.1 50.56,13.35 49.41,14.5
N$12
  Top 0.305: R12B1.1 62.91,18.01 LED3.2 62.91,14.5 | 62.91,14.5 62.91,11.99 R12C1.1 | R12A1.1 64.06,13.35 62.91,14.5
N$13
  Top 0.305: R13B1.1 76.41,18.01 LED4.2 76.41,14.5 | 76.41,14.5 76.41,11.99 R13C1.1 | R13A1.1 77.56,13.35 76.41,14.5
N$14
  Top 0.305: R14B1.1 89.91,18.01 LED5.2 89.91,14.5 | 89.91,14.5 89.91,11.99 R14C1.1 | R14A1.1 91.06,13.35 89.91,14.5
N$15
  Top 0.305: R8B2.1 9.15,25.24 LED20.2 8.91,24.5 | 8.91,24.5 8.91,21.99 R8C2.1 | R8A2.1 10.06,23.35 8.91,24.5
N$16
  Top 0.305: R9B2.1 22.39,27.99 22.39,25.02 LED21.2 22.72,24.69 22.72,24.25 | R9C2.1 22.47,21.93 22.47,24.5 22.72,24.25 | R9A2.1 23.62,23.35 22.72,24.25
N$17
  Top 0.305: R10B2.1 35.91,28.01 LED15.2 35.91,24.5 | 35.91,24.5 35.91,21.99 R10C2.1 | R10A2.1 37.06,23.35 35.91,24.5
N$18
  Top 0.305: R11B2.1 49.41,28.01 LED16.2 49.41,24.5 | 49.41,24.5 49.41,21.99 R11C2.1 | R11A2.1 50.56,23.35 49.41,24.5
N$19
  Top 0.305: R12B2.1 62.91,28.01 LED17.2 62.91,24.5 | 62.91,24.5 62.91,21.99 R12C2.1 | R12A2.1 64.06,23.35 62.91,24.5
N$20
  Top 0.305: R13B2.1 76.41,28.01 LED18.2 76.41,24.5 | 76.41,24.5 76.41,21.99 R13C2.1 | R13A2.1 77.56,23.35 76.41,24.5
N$21
  Top 0.305: R14B2.1 89.91,28.01 LED19.2 89.91,24.5 | 89.91,24.5 89.91,21.99 R14C2.1 | R14A2.1 91.06,23.35 89.91,24.5
N$22
  Top 0.305: R8B3.1 9.15,35.24 LED27.2 8.91,34.5 | 8.91,34.5 8.91,31.99 R8C3.1 | R8A3.1 10.06,33.35 8.91,34.5
N$23
  Top 0.305: R9B3.1 22.39,37.99 22.39,35.02 LED28.2 22.72,34.69 22.72,34.25 | R9C3.1 22.47,31.93 22.47,34.5 22.72,34.25 | R9A3.1 23.62,33.35 22.72,34.25
N$24
  Top 0.305: R10B3.1 35.91,38.01 LED22.2 35.91,34.5 | 35.91,34.5 35.91,31.99 R10C3.1 | R10A3.1 37.06,33.35 35.91,34.5
N$25
  Top 0.305: R11B3.1 49.41,38.01 LED23.2 49.41,34.5 | 49.41,34.5 49.41,31.99 R11C3.1 | R11A3.1 50.56,33.35 49.41,34.5
N$26
  Top 0.305: R12B3.1 62.91,38.01 LED24.2 62.91,34.5 | 62.91,34.5 62.91,31.99 R12C3.1 | R12A3.1 64.06,33.35 62.91,34.5
N$27
  Top 0.305: R13B3.1 76.41,38.01 LED25.2 76.41,34.5 | 76.41,34.5 76.41,31.99 R13C3.1 | R13A3.1 77.56,33.35 76.41,34.5
N$28
  Top 0.305: R14B3.1 89.91,38.01 LED26.2 89.91,34.5 | 89.91,34.5 89.91,31.99 R14C3.1 | R14A3.1 91.06,33.35 89.91,34.5
N$29
  Top 0.203: LED29.2 9.94,44.75 9.94,44.5 | R1C.1
  Top 0.305: R1B.1 LED29.2 | 9.94,44.5 R1C.1 | R1A.1 8.64,43.45 9.94,44.75
N$30
  Top 0.203: LED30.2
  Top 0.305: R2B.1 LED30.2 | LED30.2 23.44,44.75 | 23.44,44.75 R2C.1 | R2A.1 22.14,43.45 23.44,44.75
N$31
  Top 0.305: R3B.1 LED31.2 36.94,44.75 | 36.94,44.75 R3C.1 | R3A.1 35.64,43.45 36.94,44.75
N$32
  Top 0.305: R4B.1 LED32.2 50.44,44.75 | 50.44,44.75 R4C.1 | R4A.1 49.14,43.45 50.44,44.75
N$33
  Top 0.305: R5B.1 LED33.2 63.95,44.75 | 63.95,44.75 R5C.1 | R5A.1 62.65,43.45 63.95,44.75
N$34
  Top 0.305: R6B.1 LED34.2 77.44,44.75 | 77.44,44.75 R6C.1 | R6A.1 76.14,43.45 77.44,44.75
N$35
  Top 0.305: R7B.1 LED35.2 90.94,44.75 | 90.94,44.75 R7C.1 | R7A.1 89.64,43.45 90.94,44.75
N$36
  Top 0.203: LED36.2 9.94,54.75 9.94,54.5 | R1C1.1
  Top 0.305: R1B1.1 LED36.2 | 9.94,54.5 R1C1.1 | R1A1.1 8.64,53.45 9.94,54.75
N$37
  Top 0.203: LED37.2
  Top 0.305: R2B1.1 LED37.2 | LED37.2 23.44,54.75 | 23.44,54.75 R2C1.1 | R2A1.1 22.14,53.45 23.44,54.75
N$38
  Top 0.305: R3B1.1 LED38.2 36.94,54.75 | 36.94,54.75 R3C1.1 | R3A1.1 35.64,53.45 36.94,54.75
N$39
  Top 0.305: R4B1.1 LED39.2 50.44,54.75 | 50.44,54.75 R4C1.1 | R4A1.1 49.14,53.45 50.44,54.75
N$40
  Top 0.305: R5B1.1 LED40.2 63.95,54.75 | 63.95,54.75 R5C1.1 | R5A1.1 62.65,53.45 63.95,54.75
N$41
  Top 0.305: R6B1.1 LED41.2 77.44,54.75 | 77.44,54.75 R6C1.1 | R6A1.1 76.14,53.45 77.44,54.75
N$42
  Top 0.305: R7B1.1 LED42.2 90.94,54.75 | 90.94,54.75 R7C1.1 | R7A1.1 89.64,53.45 90.94,54.75
N$43
  Top 0.203: LED43.2 9.94,64.75 9.94,64.5 | R1C2.1
  Top 0.305: R1B2.1 LED43.2 | 9.94,64.5 R1C2.1 | R1A2.1 8.64,63.45 9.94,64.75
N$44
  Top 0.203: LED44.2
  Top 0.305: R2B2.1 LED44.2 | LED44.2 23.44,64.75 | 23.44,64.75 R2C2.1 | R2A2.1 22.14,63.45 23.44,64.75
N$45
  Top 0.305: R3B2.1 LED45.2 36.94,64.75 | 36.94,64.75 R3C2.1 | R3A2.1 35.64,63.45 36.94,64.75
N$46
  Top 0.305: R4B2.1 LED46.2 50.44,64.75 | 50.44,64.75 R4C2.1 | R4A2.1 49.14,63.45 50.44,64.75
N$47
  Top 0.305: R5B2.1 LED47.2 63.95,64.75 | 63.95,64.75 R5C2.1 | R5A2.1 62.65,63.45 63.95,64.75
N$48
  Top 0.305: R6B2.1 LED48.2 77.44,64.75 | 77.44,64.75 R6C2.1 | R6A2.1 76.14,63.45 77.44,64.75
N$49
  Top 0.305: R7B2.1 LED49.2 90.94,64.75 | 90.94,64.75 R7C2.1 | R7A2.1 89.64,63.45 90.94,64.75
N$50
  Top 0.203: LED50.2 9.94,74.75 9.94,74.5 | R1C3.1
  Top 0.305: R1B3.1 LED50.2 | 9.94,74.5 R1C3.1 | R1A3.1 8.64,73.45 9.94,74.75
N$51
  Top 0.203: LED51.2
  Top 0.305: R2B3.1 LED51.2 | LED51.2 23.44,74.75 | 23.44,74.75 R2C3.1 | R2A3.1 22.14,73.45 23.44,74.75
N$52
  Top 0.305: R3B3.1 LED52.2 36.94,74.75 | 36.94,74.75 R3C3.1 | R3A3.1 35.64,73.45 36.94,74.75
N$53
  Top 0.305: R4B3.1 LED53.2 50.44,74.75 | 50.44,74.75 R4C3.1 | R4A3.1 49.14,73.45 50.44,74.75
N$54
  Top 0.305: R5B3.1 LED54.2 63.95,74.75 | 63.95,74.75 R5C3.1 | R5A3.1 62.65,73.45 63.95,74.75
N$55
  Top 0.305: R6B3.1 LED55.2 77.44,74.75 | 77.44,74.75 R6C3.1 | R6A3.1 76.14,73.45 77.44,74.75
N$56
  Top 0.305: R7B3.1 LED56.2 90.94,74.75 | 90.94,74.75 R7C3.1 | R7A3.1 89.64,73.45 90.94,74.75
POWER  (via drill 0.35)
  Top 0.406: R8B.2 3.75,6.15 3.75,3.75 5.75,1.75 R8C.2 | 44.1,6 44,6 | R12B.2 57.75,6.15 57.75,3.85 R12C.2 | R13B.2 71.25,6.15 71.25,3.85 R13C.2 | R14B.2 84.75,6.15 84.75,3.85 R14C.2 | R11B.2 44.25,6.15 44.25,3.85 R11C.2 | R10B.2 30.75,6.15 30.75,3.85 R10C.2 | R9B.2 17.25,6.15 17.25,3.85 R9C.2
  other vias: 18,8.25 31.5,8.25 45,8.25 58.5,8.25 72,8.25 85.5,8.25 95,6.75 95,8.25 81.5,8.25 68,8.25 54.5,8.25 41,8.25 27.5,8.25 14,8.25 3.5,7.5 4.5,6.75 7.5,8.25 21,8.25 34.5,8.25 48,8.25 61.5,8.25 75,8.25 88.5,8.25 92.5,8.25 79,8.25 65.5,8.25 52,8.25 38.5,8.25 25,8.25 11.5,8.25
  pour Bottom: 0.5,9.25 0.5,5.5 99.5,5.5 99.5,9.25
  pour Top: 0.5,9.25 0.5,5.5 99.5,5.5 99.5,9.25
POWER1  (via drill 0.35)
  Top 0.406: R8B1.2 3.75,16.15 3.75,13.75 5.75,11.75 R8C1.2 | 44.1,16 44,16 | R12B1.2 57.75,16.15 57.75,13.85 R12C1.2 | R13B1.2 71.25,16.15 71.25,13.85 R13C1.2 | R14B1.2 84.75,16.15 84.75,13.85 R14C1.2 | R11B1.2 44.25,16.15 44.25,13.85 R11C1.2 | R10B1.2 30.75,16.15 30.75,13.85 R10C1.2 | R9B1.2 17.25,16.15 17.25,13.85 R9C1.2
  other vias: 18,18.25 31.5,18.25 45,18.25 58.5,18.25 72,18.25 85.5,18.25 95,16.75 95,18.25 81.5,18.25 68,18.25 54.5,18.25 41,18.25 27.5,18.25 14,18.25 3.5,17.5 4.5,16.75 7.5,18.25 21,18.25 34.5,18.25 48,18.25 61.5,18.25 75,18.25 88.5,18.25 92.5,18.25 79,18.25 65.5,18.25 52,18.25 38.5,18.25 25,18.25 11.5,18.25
  pour Bottom: 0.5,19.25 0.5,15.5 99.5,15.5 99.5,19.25
  pour Top: 0.5,19.25 0.5,15.5 99.5,15.5 99.5,19.25
POWER2  (via drill 0.35)
  Top 0.406: R8B2.2 3.75,26.15 3.75,23.75 5.75,21.75 R8C2.2 | 44.1,26 44,26 | R12B2.2 57.75,26.15 57.75,23.85 R12C2.2 | R13B2.2 71.25,26.15 71.25,23.85 R13C2.2 | R14B2.2 84.75,26.15 84.75,23.85 R14C2.2 | R11B2.2 44.25,26.15 44.25,23.85 R11C2.2 | R10B2.2 30.75,26.15 30.75,23.85 R10C2.2 | R9B2.2 17.25,26.15 17.25,23.85 R9C2.2
  other vias: 18,28.25 31.5,28.25 45,28.25 58.5,28.25 72,28.25 85.5,28.25 95,26.75 95,28.25 81.5,28.25 68,28.25 54.5,28.25 41,28.25 27.5,28.25 14,28.25 3.5,27.5 4.5,26.75 7.5,28.25 21,28.25 34.5,28.25 48,28.25 61.5,28.25 75,28.25 88.5,28.25 92.5,28.25 79,28.25 65.5,28.25 52,28.25 38.5,28.25 25,28.25 11.5,28.25
  pour Bottom: 0.5,29.25 0.5,25.5 99.5,25.5 99.5,29.25
  pour Top: 0.5,29.25 0.5,25.5 99.5,25.5 99.5,29.25
POWER3  (via drill 0.35)
  Top 0.406: R8B3.2 3.75,36.15 3.75,33.75 5.75,31.75 R8C3.2 | 44.1,36 44,36 | R12B3.2 57.75,36.15 57.75,33.85 R12C3.2 | R13B3.2 71.25,36.15 71.25,33.85 R13C3.2 | R14B3.2 84.75,36.15 84.75,33.85 R14C3.2 | R11B3.2 44.25,36.15 44.25,33.85 R11C3.2 | R10B3.2 30.75,36.15 30.75,33.85 R10C3.2 | R9B3.2 17.25,36.15 17.25,33.85 R9C3.2
  other vias: 18,38.25 31.5,38.25 45,38.25 58.5,38.25 72,38.25 85.5,38.25 95,36.75 95,38.25 81.5,38.25 68,38.25 54.5,38.25 41,38.25 27.5,38.25 14,38.25 3.5,37.5 4.5,36.75 7.5,38.25 21,38.25 34.5,38.25 48,38.25 61.5,38.25 75,38.25 88.5,38.25 92.5,38.25 79,38.25 65.5,38.25 52,38.25 38.5,38.25 25,38.25 11.5,38.25
  pour Bottom: 0.5,39.25 0.5,35.5 99.5,35.5 99.5,39.25
  pour Top: 0.5,39.25 0.5,35.5 99.5,35.5 99.5,39.25
POWER4  (via drill 0.35)
  Top 0.406: R7B.2 96.25,46.05 96.25,43.95 R7C.2 | R6B.2 82.75,46.05 82.75,43.95 R6C.2 | R5B.2 69.25,46.05 69.25,43.95 R5C.2 | R4B.2 55.75,46.05 55.75,43.95 R4C.2 | R3B.2 42.25,46.05 42.25,43.95 R3C.2 | R2B.2 28.75,46.05 28.75,43.95 R2C.2 | R1B.2 15.25,46.05 15.25,43.95 R1C.2
  other vias: 5,47.25 7.25,48.25 20.75,48.25 34.25,48.25 47.75,48.25 61.25,48.25 74.75,48.25 88.25,48.25 96.75,47.25 16.5,48.25 30,48.25 43.5,48.25 57,48.25 70.5,48.25 84,48.25 92.5,48.25 79,48.25 65.5,48.25 52,48.25 38.5,48.25 25,48.25 11.5,48.25 95.75,46.25
  pour Bottom: 0.5,45.5 0.5,49.25 99.5,49.25 99.5,45.5
  pour Top: 0.5,49.25 0.5,45.5 99.5,45.5 99.5,49.25
POWER5  (via drill 0.35)
  Top 0.406: R7B1.2 96.25,56.05 96.25,53.95 R7C1.2 | R6B1.2 82.75,56.05 82.75,53.95 R6C1.2 | R5B1.2 69.25,56.05 69.25,53.95 R5C1.2 | R4B1.2 55.75,56.05 55.75,53.95 R4C1.2 | R3B1.2 42.25,56.05 42.25,53.95 R3C1.2 | R2B1.2 28.75,56.05 28.75,53.95 R2C1.2 | R1B1.2 15.25,56.05 15.25,53.95 R1C1.2
  other vias: 5,57.25 7.25,58.25 20.75,58.25 34.25,58.25 47.75,58.25 61.25,58.25 74.75,58.25 88.25,58.25 96.75,57.25 16.5,58.25 30,58.25 43.5,58.25 57,58.25 70.5,58.25 84,58.25 92.5,58.25 79,58.25 65.5,58.25 52,58.25 38.5,58.25 25,58.25 11.5,58.25 95.75,56.25
  pour Bottom: 0.5,55.5 0.5,59.25 99.5,59.25 99.5,55.5
  pour Top: 0.5,59.25 0.5,55.5 99.5,55.5 99.5,59.25
POWER6  (via drill 0.35)
  Top 0.406: R7B2.2 96.25,66.05 96.25,63.95 R7C2.2 | R6B2.2 82.75,66.05 82.75,63.95 R6C2.2 | R5B2.2 69.25,66.05 69.25,63.95 R5C2.2 | R4B2.2 55.75,66.05 55.75,63.95 R4C2.2 | R3B2.2 42.25,66.05 42.25,63.95 R3C2.2 | R2B2.2 28.75,66.05 28.75,63.95 R2C2.2 | R1B2.2 15.25,66.05 15.25,63.95 R1C2.2
  other vias: 5,67.25 7.25,68.25 20.75,68.25 34.25,68.25 47.75,68.25 61.25,68.25 74.75,68.25 88.25,68.25 96.75,67.25 16.5,68.25 30,68.25 43.5,68.25 57,68.25 70.5,68.25 84,68.25 92.5,68.25 79,68.25 65.5,68.25 52,68.25 38.5,68.25 25,68.25 11.5,68.25 95.75,66.25
  pour Bottom: 0.5,65.5 0.5,69.25 99.5,69.25 99.5,65.5
  pour Top: 0.5,69.25 0.5,65.5 99.5,65.5 99.5,69.25
POWER7  (via drill 0.35)
  Top 0.406: R7B3.2 96.25,76.05 96.25,73.95 R7C3.2 | R6B3.2 82.75,76.05 82.75,73.95 R6C3.2 | R5B3.2 69.25,76.05 69.25,73.95 R5C3.2 | R4B3.2 55.75,76.05 55.75,73.95 R4C3.2 | R3B3.2 42.25,76.05 42.25,73.95 R3C3.2 | R2B3.2 28.75,76.05 28.75,73.95 R2C3.2 | R1B3.2 15.25,76.05 15.25,73.95 R1C3.2
  other vias: 5,77.25 7.25,78.25 20.75,78.25 34.25,78.25 47.75,78.25 61.25,78.25 74.75,78.25 88.25,78.25 96.75,77.25 16.5,78.25 30,78.25 43.5,78.25 57,78.25 70.5,78.25 84,78.25 92.5,78.25 79,78.25 65.5,78.25 52,78.25 38.5,78.25 25,78.25 11.5,78.25 95.75,76.25
  pour Bottom: 0.5,75.5 0.5,79.25 99.5,79.25 99.5,75.5
  pour Top: 0.5,79.25 0.5,75.5 99.5,75.5 99.5,79.25

## Text on the board
bPlace: Illumina / (C) 2021 BRIGHT-CHIPS | Illumina / (C) 2021 BRIGHT-CHIPS | Illumina / (C) 2021 BRIGHT-CHIPS | Illumina / (C) 2021 BRIGHT-CHIPS | Illumina / (C)2021 BRIGHT-CHIPS | Illumina / (C)2021 BRIGHT-CHIPS | Illumina / (C)2021 BRIGHT-CHIPS | Illumina / (C)2021 BRIGHT-CHIPS
tKeepout: V-cut | V-cut | V-cut | V-cut | V-cut | V-cut | V-cut | V-cut | V-cut | V-cut | V-cut | V-cut | V-cut | V-cut
_tNames: R1B | R2B | R3B | R4B | R5B | R6B | R7B | V1 | R1A | LED1 | LED2 | R3A | LED3 | R4A | LED4 | R5A | LED5 | R6A | LED6 | LED7 | V2 | G1 | G2 | R2A | R7A | R1C | R2C | R3C | R4C | R5C | R6C | R7C | R1B | R2B | R3B | R4B | R5B | R6B | R7B | V1 | R1A | LED1 | LED2 | R3A | LED3 | R4A | LED4 | R5A | LED5 | R6A | LED6 | LED7 | V2 | G1 | G2 | R2A | R7A | R1C | R2C | R3C | R4C | R5C | R6C | R7C | R1B | R2B | R3B | R4B | R5B | R6B | R7B | V1 | R1A | LED1 | LED2 | R3A | LED3 | R4A | LED4 | R5A | LED5 | R6A | LED6 | LED7 | V2 | G1 | G2 | R2A | R7A | R1C | R2C | R3C | R4C | R5C | R6C | R7C | R1B | R2B | R3B | R4B | R5B | R6B | R7B | V1 | R1A | LED1 | LED2 | R3A | LED3 | R4A | LED4 | R5A | LED5 | R6A | LED6 | LED7 | V2 | G1 | G2 | R2A | R7A | R1C | R2C | R3C | R4C | R5C | R6C | R7C | R8B | R9B | R10B | R11B | R12B | R13B | R14B | V1 | LED8 | R8A | LED9 | R9A | LED10 | R10A | LED11 | R11A | LED12 | R12A | LED13 | R13A | LED14 | R14A | V2 | G1 | G2 | R8C | R9C | R10C | R11C | R12C | R13C | R14C | R8B | R9B | R10B | R11B | R12B | R13B | R14B | V1 | LED8 | R8A | LED9 | R9A | LED10 | R10A | LED11 | R11A | LED12 | R12A | LED13 | R13A | LED14 | R14A | V2 | G1 | G2 | R8C | R9C | R10C | R11C | R12C | R13C | R14C | R8B | R9B | R10B | R11B | R12B | R13B | R14B | V1 | LED8 | R8A | LED9 | R9A | LED10 | R10A | LED11 | R11A | LED12 | R12A | LED13 | R13A | LED14 | R14A | V2 | G1 | G2 | R8C | R9C | R10C | R11C | R12C | R13C | R14C | R8B | R9B | R10B | R11B | R12B | R13B | R14B | V1 | LED8 | R8A | LED9 | R9A | LED10 | R10A | LED11 | R11A | LED12 | R12A | LED13 | R13A | LED14 | R14A | V2 | G1 | G2 | R8C | R9C | R10C | R11C | R12C | R13C | R14C